# Altium PCB CNC_shield_mkr1000_PCB.PcbDoc
Units mil, origin at the board's own origin, x right, y up, seen from the top; angles counter-clockwise.
Board outline 4734.41 x 3159.61 mil, 2 copper layers (Top Layer, Bottom Layer); 13 components, 32 nets, 111 pads, 0 vias.
Unrouted connection lines stored in the file: 2.
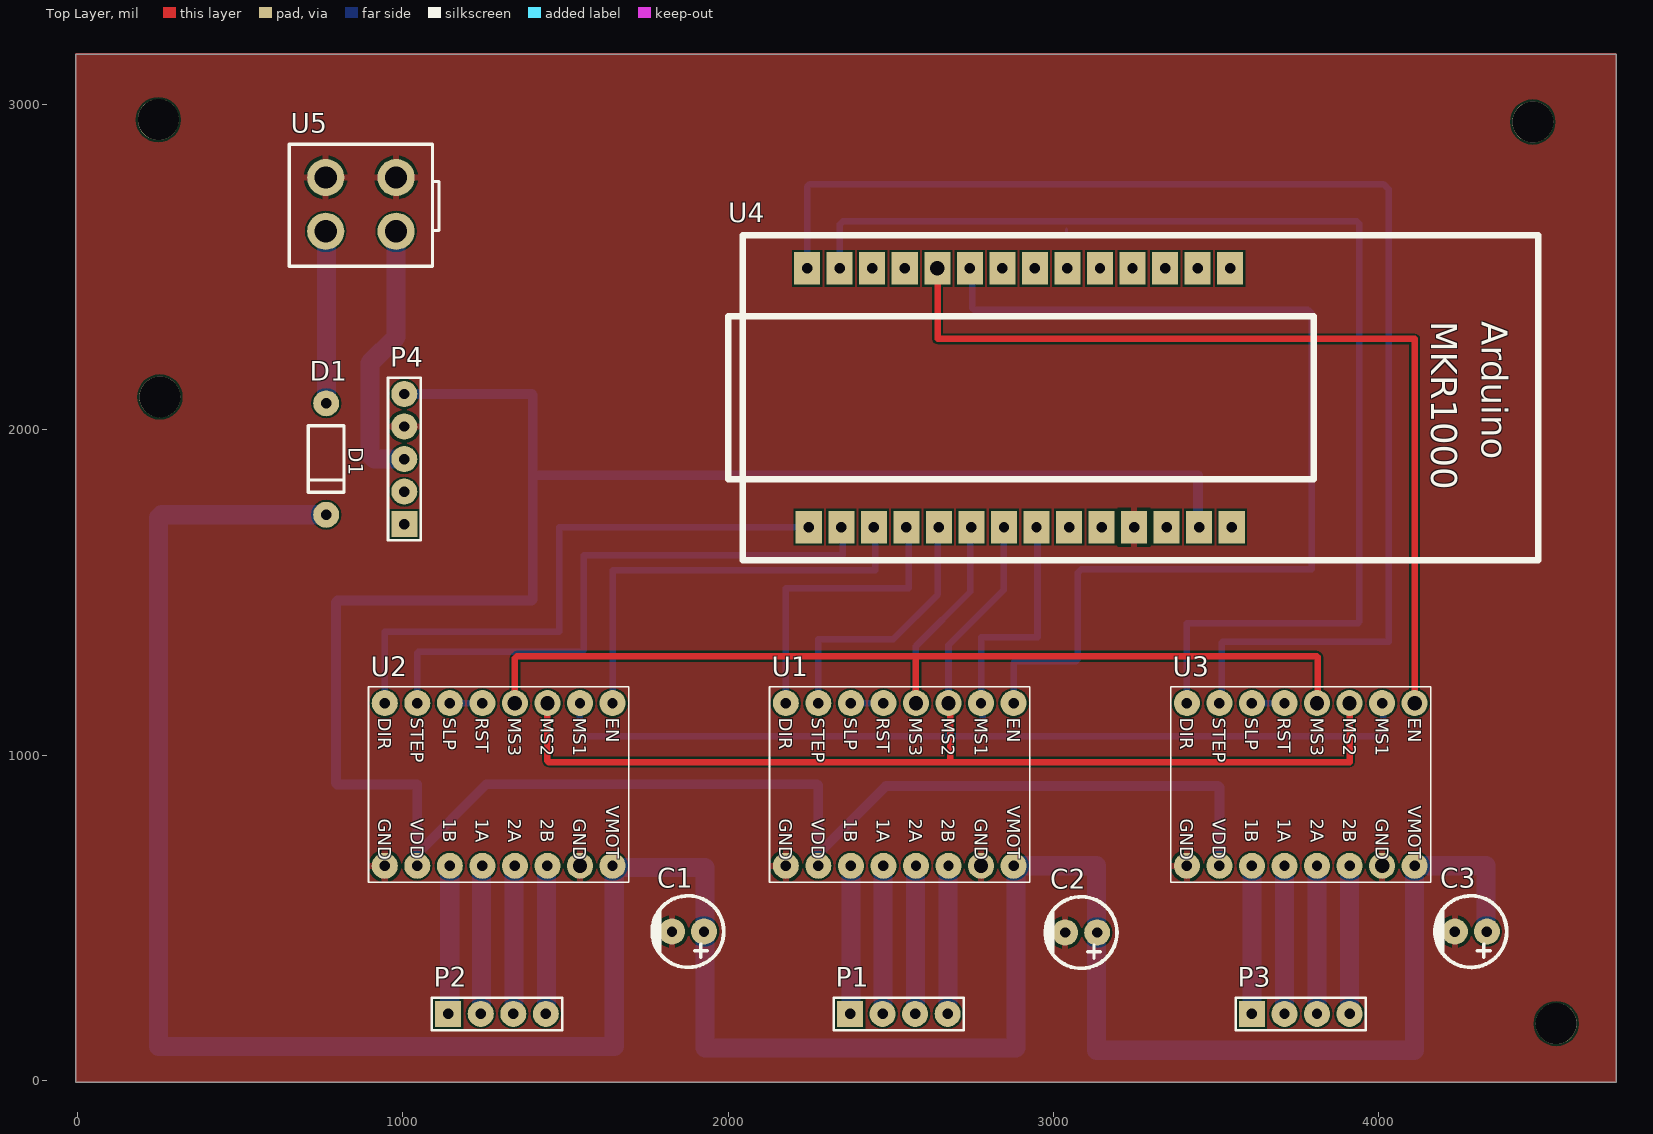
[diagram p0: Top Layer view]
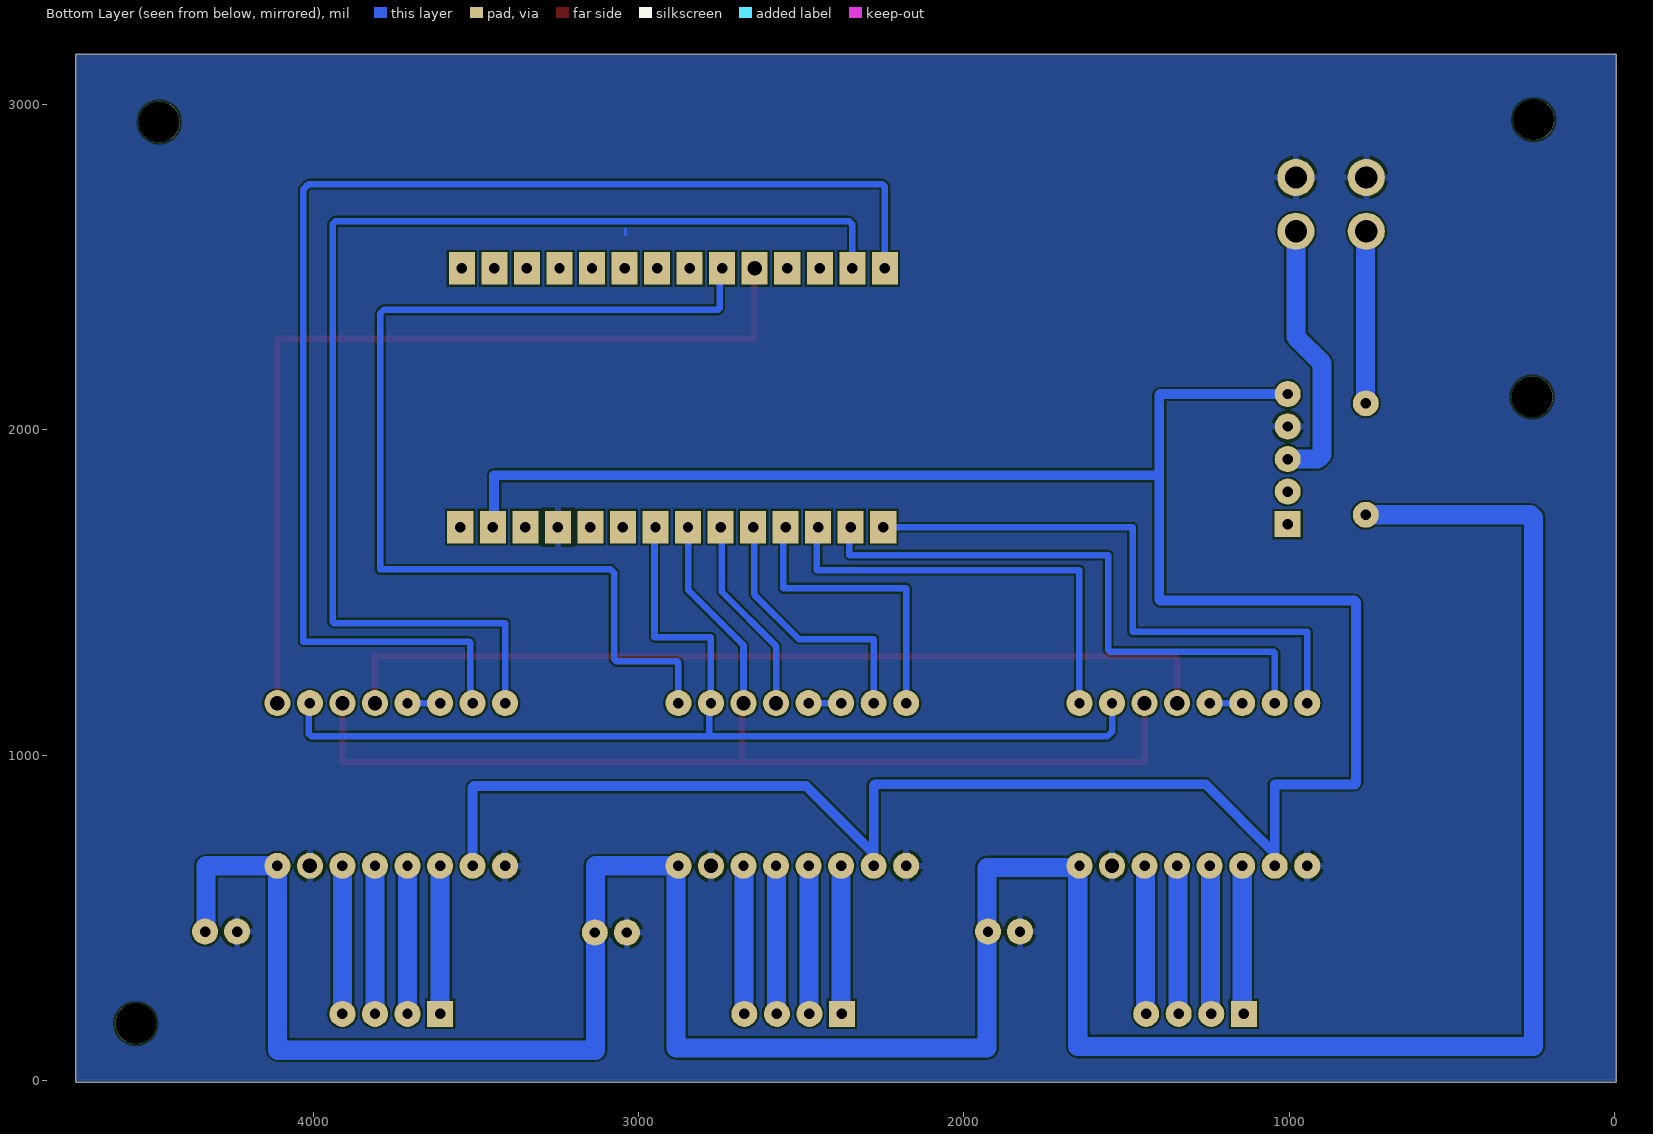
[diagram p1: Bottom Layer view, seen from below]

## Layer stack, top to bottom
Top Solder: solder mask 0.4, Solder Resist, Dk 3.5
Top Layer: signal copper 1.4
Dielectric 1: dielectric 12.6, FR-4, Dk 4.8
Bottom Layer: signal copper 1.4
Bottom Solder: solder mask 0.4, Solder Resist, Dk 3.5

## Board outline
-5,-5 -5,3154.61 4729.41,3154.61 4729.41,-5

## Design rules (kind name [scope] priority, off if disabled: settings)
Clearance [All] p1: gap=6 ignorepadtopadclearanceinfootprint=FALSE
PlaneClearance [All] p1: clearance=8
PolygonConnect [All] p1: connectstyle=Relief reliefconductorwidth=20 reliefentries=4 polygonreliefangle="90 Angle" airgapwidth=10
RoomDefinition CNC_shield_for_mkr1000_Sch [InComponentClass('CNC_shield_for_mkr1000_Sch')] p1: confinementstyle=ConfineIn formatcopy=TRUE lockcomponents=FALSE outline -1535,-1745 465,-1745 465,-745 -1535,-745
RoutingVias [All] p1: holewidth=12 width=22 viastyle="Through Hole" minholewidth=12 minwidth=22 maxholewidth=12 maxwidth=22
SolderMaskExpansion [All] p1: expansion=4
Width Power [InNetClass('Power')] p1: maxlimit=50 minlimit=15 preferedwidth=30 minimp=50.000000 maximp=50.000000 favimp=50.000000
Width [All] p2: maxlimit=50 minlimit=6 preferedwidth=20 minimp=50.000000 maximp=50.000000 favimp=50.000000
29 further rules are at their usual default settings.

## Components (designator, comment, footprint, x,y, rotation, side; value= is the part's Value field where it differs from the comment)
C1 "C43803" C43803 1877,458 r180 top value=100uF
C2 "C43803" C43803 3085.21,455 r180 top value=100uF
C3 "C43803" C43803 4282.86,457.93 r180 top value=100uF
D1 "MUR120" MUR120 765,1910 r270 top
P1 "Header 1 x 4" HDR1X4 2375,205 r0 top
P2 "Header 1 x 4" HDR1X4 1140,205 r0 top
P3 "Header 1 x 4" HDR1X4 3610,205 r0 top
P4 "Header 5" HDR1X5 1005,1710 r90 top
U1 "A4988" "A4988 DRIVER"#1 2527.5,910 r270 top
U2 "A4988" "A4988 DRIVER"#1 1295,910 r270 top
U3 "A4988" "A4988 DRIVER"#2 3760,910 r270 top
U4 "MKR 1000" MKR1000 2895.5,2098.5 r270 top
U5 "ATX 4" ATX4 871.75,2692.7 r0 top

## Footprints (in the part's own frame and the unit in brackets; to place one, negate y for a bottom-side part, rotate by r counter-clockwise, add the part's x,y. Pads: shape width x height; smd on the part's side, far side on the other; paste and mask are expansions set on the pad)
"A4988 DRIVER"#1 [mil]
  round 80 hole 32: 1(-250,350) 2(-250,250) 5(-250,-50) 6(-250,-150) 7(-250,-250) 8(-250,-350) 9(250,-350) 10(250,-250) 11(250,-150) 12(250,-50) 13(250,50) 14(250,150) 16(250,350)
  round 80 hole 44: 3(-250,150) 4(-250,50) 15(250,250)
  silkscreen extent -300,-400 300,400
"A4988 DRIVER"#2 [mil]
  round 80 hole 44: 1(-250,350) 3(-250,150) 4(-250,50) 15(250,250)
  round 80 hole 32: 2(-250,250) 5(-250,-50) 6(-250,-150) 7(-250,-250) 8(-250,-350) 9(250,-350) 10(250,-250) 11(250,-150) 12(250,-50) 13(250,50) 14(250,150) 16(250,350)
  silkscreen extent -300,-400 300,400
ATX4 [mil]
  round 114.21 hole 68: 1(-108.25,-82.7) 2(-108.25,82.7) 3(108.25,-82.7) 4(108.25,82.7)
  silkscreen extent -220,-190 240,185
C43803 [mil] "Polarized Capacitor with 16V 5*7"
  round 80 hole 32: 1(-49.21,0) 2(49.21,0)
  silkscreen extent -110,-110 110,110
HDR1X4 [mil] "Connector; Header; 4 Position"
  rect 80x80 hole 32: 1(0,0)
  round 80 hole 32: 2(100,0) 3(200,0) 4(300,0)
  silkscreen extent -50,-50 350,50
HDR1X5 [mil] "Connector; Header; 5 Position"
  rect 80x80 hole 32: 1(0,0)
  round 80 hole 32: 2(100,0) 3(200,0) 4(300,0) 5(400,0)
  silkscreen extent -50,-50 450,50
MKR1000 [mil]
  rect 100x80 hole 32: 1(-397.5,647.5) 1(-397.5,647.5) 2(-397.5,547.5) 2(-397.5,547.5) 3(-397.5,447.5) 4(-397.5,347.5) 5(-397.5,247.5) 6(-397.5,147.5) 7(-397.5,47.5) 8(-397.5,-52.5) 9(-397.5,-152.5) 11(-397.5,-352.5) 12(-397.5,-452.5) 13(-397.5,-552.5) 14(-397.5,-652.5) 15(397.5,-647.5) 16(397.5,-547.5) 17(397.5,-447.5) 18(397.5,-347.5) 19(397.5,-247.5) 20(397.5,-147.5) 21(397.5,-47.5) 22(397.5,52.5) 23(397.5,152.5) 24(397.5,252.5) 25(397.5,352.5) 26(397.5,452.5) 27(397.5,552.5) 28(397.5,652.5)
  rect 100x80 hole 44: 10(-397.5,-252.5)
  silkscreen extent -500,-895 500,1595
MUR120 [mil] "MUR120_diode"
  round 80 hole 32: 1(-171.26,0) 2(171.26,0)
  silkscreen extent -102,-55 102,55

## Part data
C1 C2 C3: "Polarized Capacitor", LatestRevisionDate=29-May-2009, LatestRevisionNote="IPC-7351 Footprint Added.", PackageDescription="Chip Capacitor", PackageReference=C0805, Published=8-Jun-2000, Publisher="Altium Limited"
D1: "Diode", Code_JEDEC=DO-214-AB, LatestRevisionDate=17-Jul-2002, LatestRevisionNote="Re-released for DXP Platform.", PackageDescription="DO-214-AB/SMC; 2 C-Bend Leads; Body 7.9 x 5.9 mm, inc. leads (LxW)", PackageReference=SMC, PackageVersion=Sep-1996, Published=8-Jun-2000, Publisher="Altium Limited"
P1 P2 P3: "Header, 4-Pin", LatestRevisionDate=17-Jul-2002, LatestRevisionNote="Re-released for DXP Platform.", Publisher="Altium Limited"
P4: library part Header1x5, "Header, 5-Pin", LatestRevisionDate=17-Jul-2002, LatestRevisionNote="Re-released for DXP Platform.", Publisher="Altium Limited"
U1 U2 U3: "Motor Driver"
U4: library part "Arduino MKR 1000", "Arduino wifi"
U5: "ATX 4Pins power connector"

## Free pads (board coordinates)
  round 126 hole 126 unplated: 1(254,2101) 2(249,2953) 3(4545,175) 4(4473,2946)

## Nets (pads, with @x,y where several pads share a name; then routed paths per layer and width w, separated by ;. In a path a pad name is that pad's centre, name@x,y a point inside that pad or via, vN(x,y) a via of type N, cw(c..) or ccw(c..) an arc to the next point about the centre after c; other vN are vias at no path point)
GND: C1.2 C2.2 C3.2 P4.4 U1.9 U1.15 U2.9 U2.15 U3.9 U3.15 U4.25 U5.2 U5.4 | length 45.5
  Bottom Layer w10: U5.4@976.75,2778.64 U5.4 ; U2.15@1539.14,665.86 U2.15 ; U1.15 U1.15@2785,667.5 ; 3040,2600 3040,2617
  Bottom Layer w30: U3.9@3410,655 U3.9
NetC1_1: C1.1 C2.1 C3.1 D1.2 U1.16 U2.16 U3.16 | length 9235
  Bottom Layer w59.06: D1.2@755,1738.74 258.74,1738.74 250,1730 250,105 1650,105 U2.16@1650,655 ; U2.16 U2.16@1650,655 ; C3.1@4335,455 4329.14,460.86 4329.14,660 U3.16 4110,95 4108.51,93.51 3132.19,93.51 3132.19,455 3132.19,660 2895,660 2885,660 U1.16 2885,652.5 2885,100 1929.37,100 1929.37,455 1929.37,655 U2.16@1650,655
NetD1_1: D1.1 U5.1 | length 509.3
  Bottom Layer w59.06: D1.1@765.88,2092.14 U5.1@765.88,2601.43
NetP1_1: P1.1 U1.11 | length 452.5
  Bottom Layer w59.06: P1.1@2377.5,207.5 U1.11
NetP1_2: P1.2 U1.12 | length 452.5
  Bottom Layer w59.06: P1.2@2476.25,206.25 U1.12@2476.25,658.75
NetP1_3: P1.3 U1.13 | length 452.5
  Bottom Layer w59.06: P1.3@2576.25,206.25 U1.13@2576.25,658.75
NetP1_4: P1.4 U1.14 | length 452.5
  Bottom Layer w59.06: P1.4@2676.25,206.25 U1.14@2676.25,658.75
NetP2_1: P2.1 U2.11 | length 450
  Bottom Layer w59.06: P2.1@1145,210 U2.11
NetP2_2: P2.2 U2.12 | length 450
  Bottom Layer w59.06: P2.2@1242.5,207.5 U2.12@1242.5,657.5
NetP2_3: P2.3 U2.13 | length 450
  Bottom Layer w59.06: P2.3@1342.5,207.5 U2.13@1342.5,657.5
NetP2_4: P2.4 U2.14 | length 450
  Bottom Layer w59.06: P2.4@1442.5,207.5 U2.14@1442.5,657.5
NetP3_1: P3.1 U3.11 | length 455
  Bottom Layer w59.06: P3.1 U3.11
NetP3_2: P3.2 U3.12 | length 455
  Bottom Layer w59.06: P3.2 U3.12
NetP3_3: P3.3 U3.13 | length 455
  Bottom Layer w59.06: P3.3 U3.13
NetP3_4: P3.4 U3.14 | length 455
  Bottom Layer w59.06: P3.4 U3.14
NetP4_3: P4.3 U5.3 | length 830.2
  Bottom Layer w59.06: U5.3 980,2284.89 900,2204.89 900,1923.51 913.51,1910 P4.3
NetP4_5: P4.5 U1.10 U2.10 U3.10 U4.27 | length 7997.3
  Bottom Layer w30: 795,913.51 795,1470 ; 798.51,910 1045,910 ; 800,1475 1396.49,1475 ; P4.5 1397.5,2110 1400,2107.5 1400,1860 ; U2.10 U2.10@1045,698 ; 1045,907 U2.10@1045,698 ; 1400,1478.51 1400,1860 ; 2273.99,911.01 1258.01,911.01 U2.10@1045,698 ; U1.10 U1.10@2277.5,697.5 ; 2277.5,907.5 U1.10@2277.5,697.5 ; U4.27 3444,1705 3444,1860 1400,1860 ; 3506.49,905 2485,905 U1.10@2277.5,697.5 ; U3.10 3510,901.49
NetU1_1: U1.1 U4.9 | length 3287.2
  Top Layer w20: U4.9 U4.9@2751,2488
  Bottom Layer w20: U4.9 2751,2488 2751,2373 2755,2369 3782,2369 3794,2357 3794,1572 ; U1.1 2877.5,1284.49 2881.01,1288 3068,1288 3075,1295 3075,1560 3086,1571 3794,1571
NetU1_2: U1.2 U2.2 U3.2 U4.22 | length 3496.6
  Bottom Layer w20: U2.2 1545,1072 1559,1058 2779.49,1058 ; 2848,1701 2858,1691 ; U4.22 2951,1698 2951,1362 2777.5,1362 U1.2 2783,1154.5 2783,1061.51 2779.49,1058 ; U3.2 4013,1157 4013,1065 4006,1058 2779.49,1058
NetU1_3: U1.3 U2.3 U3.3 U4.21 | length 3630.1
  Top Layer w20: U2.3 1445,982.51 1448.51,979 2679.49,979 ; U1.3 2683,1154.5 2683,982.51 2679.49,979 ; U3.3 3910,979 2679.49,979
  Bottom Layer w20: U1.3 2677.5,1337.5 2848,1508 2848,1665 2847.23,1665 U4.21@2829.62,1682.62 ; 2748,1701 2752,1697 ; U4.21@2839.51,1692.51 U4.21@2849,1683.03
NetU1_4: U1.4 U2.4 U3.4 U4.20 | length 3496.3
  Top Layer w20: U2.4 1345,1298 1351,1304 2573.99,1304 ; U1.4 2577.5,1300.49 2573.99,1304 ; U3.4 3813,1163 3813,1300.49 3809.49,1304 2573.99,1304
  Bottom Layer w20: U1.4 2577.5,1335.5 2744,1502 2744,1671 2741.23,1671 U4.20@2729.62,1682.62
NetU1_5: U1.5 U1.6 | length 100
  Bottom Layer w20: U1.6 U1.5
NetU1_7: U1.7 U4.19 | length 829.5
  Bottom Layer w20: U1.7 2277.5,1357 2508,1357 2645,1494 2645,1698 U4.19
NetU1_8: U1.8 U4.18 | length 922.8
  Bottom Layer w20: U1.8 2177.5,1513 2555,1513 2555,1694 U4.18 U4.18@2547,1700
NetU2_1: U2.1 U4.17 | length 1349.7
  Bottom Layer w20: U2.1 1645,1569 2452,1569 2452,1697 U4.17
NetU2_5: U2.5 U2.6 | length 100
  Bottom Layer w20: U2.6 U2.5
NetU2_7: U2.7 U4.16 | length 1844.1
  Bottom Layer w20: U2.7 1045,1314.49 1048.51,1318 1551,1318 1557,1324 1557,1615 2352,1615 2352,1697 U4.16
NetU2_8: U2.8 U4.15 | length 1843
  Bottom Layer w20: U2.8 945,1379 1482,1379 1482,1700 U4.15
NetU3_1: U3.1 U4.10 | length 2802.4
  Top Layer w20: U4.10 2644,2495 2644,2279 4110,2279 U3.1
NetU3_5: U3.5 U3.6 | length 100
  Bottom Layer w20: U3.6 U3.5
NetU3_7: U3.7 U4.14 | length 4140.8
  Bottom Layer w20: U4.14 2243,2747 2251,2755 4014,2755 4030,2739 4030,1349 3520.51,1349 3517,1345.49 3517,1167 U3.7
NetU3_8: U3.8 U4.13 | length 3740.4
  Bottom Layer w20: U4.13 2343,2631 2353,2641 3932,2641 3940,2633 3940,1409.51 3936.49,1406 3410,1406 U3.8
pads on no net: P4.1 P4.2 U4.1 U4.2 U4.3 U4.4 U4.5 U4.6 U4.7 U4.8 U4.11 U4.12 U4.23 U4.24 U4.26 U4.28

## Polygon pours and split planes (outlines as drawn)
GND on Bottom Layer "GND_L02_P103" (solid, remove dead copper, pour order 103): -3,3154 -3,1 4727,1 4727,3153 4728,3154
GND on Bottom Layer "NONET_L02_P097" (solid, remove dead copper, shelved, pour order 97): -3,3154 -3,1 4727,1 4729,3 4728,4 4728,3154
GND on Bottom Layer "NONET_L02_P093" (solid, remove dead copper, shelved, pour order 93): -3,3154 -3,1 4729,1 4730,2 4728,4 4728,3154
GND on Bottom Layer "NONET_L02_P089" (solid, remove dead copper, shelved, pour order 89): -3,3154 -3,1 4729,1 4730,2 4728,4 4728,3154
GND on Top Layer "GND_L01_P101" (solid, remove dead copper, pour order 101): -4,3155 -4,-4 4730,-4 4729,-3 4729,3156
GND on Top Layer "NONET_L01_P099" (solid, remove dead copper, shelved, pour order 99): -4,3155 -4,-4 4730,-4 4730,3155 4729,3156
GND on Top Layer "NONET_L01_P095" (solid, remove dead copper, shelved, pour order 95): -4,3155 -4,-4 4730,-4 4730,3155
GND on Top Layer "NONET_L01_P091" (solid, remove dead copper, shelved, pour order 91): -4,3155 -4,-4 4730,-4 4730,3155 4729,3156

## Silkscreen, mask and mechanical layers (free items; w line width, h text height)
Mechanical 1:
  lines w10: -9,-12 -7,-10 -7,3160 4731,3160 4735,3156 4735,-12 -9,-12

## Text inside footprints (layer, text, board x,y; h text height)
U1: Top Overlay "SLP" at 2357.5,1115 h40 r270; Top Overlay "RST" at 2457.5,1115 h40 r270; Top Overlay "EN" at 2857.5,1115 h40 r270; Top Overlay "VMOT" at 2857.5,845 h40 r270; Top Overlay "GND" at 2757.5,805 h40 r270; Top Overlay "2B" at 2657.5,805 h40 r270; Top Overlay "2A" at 2557.5,805 h40 r270; Top Overlay "1A" at 2457.5,805 h40 r270; Top Overlay "1B" at 2357.5,805 h40 r270; Top Overlay "VDD" at 2257.5,805 h40 r270; Top Overlay "GND" at 2157.5,805 h40 r270; Top Overlay "DIR" at 2157.5,1115 h40 r270; Top Overlay "STEP" at 2257.5,1115 h40 r270; Top Overlay "MS3" at 2557.5,1115 h40 r270; Top Overlay "MS2" at 2657.5,1115 h40 r270; Top Overlay "MS1" at 2757.5,1115 h40 r270
U2: Top Overlay "SLP" at 1125,1115 h40 r270; Top Overlay "RST" at 1225,1115 h40 r270; Top Overlay "EN" at 1625,1115 h40 r270; Top Overlay "VMOT" at 1625,845 h40 r270; Top Overlay "GND" at 1525,805 h40 r270; Top Overlay "2B" at 1425,805 h40 r270; Top Overlay "2A" at 1325,805 h40 r270; Top Overlay "1A" at 1225,805 h40 r270; Top Overlay "1B" at 1125,805 h40 r270; Top Overlay "VDD" at 1025,805 h40 r270; Top Overlay "GND" at 925,805 h40 r270; Top Overlay "DIR" at 925,1115 h40 r270; Top Overlay "STEP" at 1025,1115 h40 r270; Top Overlay "MS3" at 1325,1115 h40 r270; Top Overlay "MS2" at 1425,1115 h40 r270; Top Overlay "MS1" at 1525,1115 h40 r270
U3: Top Overlay "SLP" at 3590,1115 h40 r270; Top Overlay "RST" at 3690,1115 h40 r270; Top Overlay "EN" at 4090,1115 h40 r270; Top Overlay "VMOT" at 4090,845 h40 r270; Top Overlay "GND" at 3990,805 h40 r270; Top Overlay "2B" at 3890,805 h40 r270; Top Overlay "2A" at 3790,805 h40 r270; Top Overlay "1A" at 3690,805 h40 r270; Top Overlay "1B" at 3590,805 h40 r270; Top Overlay "VDD" at 3490,805 h40 r270; Top Overlay "GND" at 3390,805 h40 r270; Top Overlay "DIR" at 3390,1115 h40 r270; Top Overlay "STEP" at 3490,1115 h40 r270; Top Overlay "MS3" at 3790,1115 h40 r270; Top Overlay "MS2" at 3890,1115 h40 r270; Top Overlay "MS1" at 3990,1115 h40 r270
U4: Top Overlay "Arduino" at 4315.5,2333.5 h80 r270; Top Overlay "MKR1000" at 4160.5,2333.5 h80 r270